# Altium PCB DP-SMD_CAR06-201EN5F.pcbdoc
Units mil, origin at the board's own origin, x right, y up, seen from the top; angles counter-clockwise.
Board outline 1231.66 x 1132.8 mil, 2 copper layers (Top Layer, Bottom Layer), stack 0 mil thick; 1 components, 0 nets, 24 pads, 0 vias.
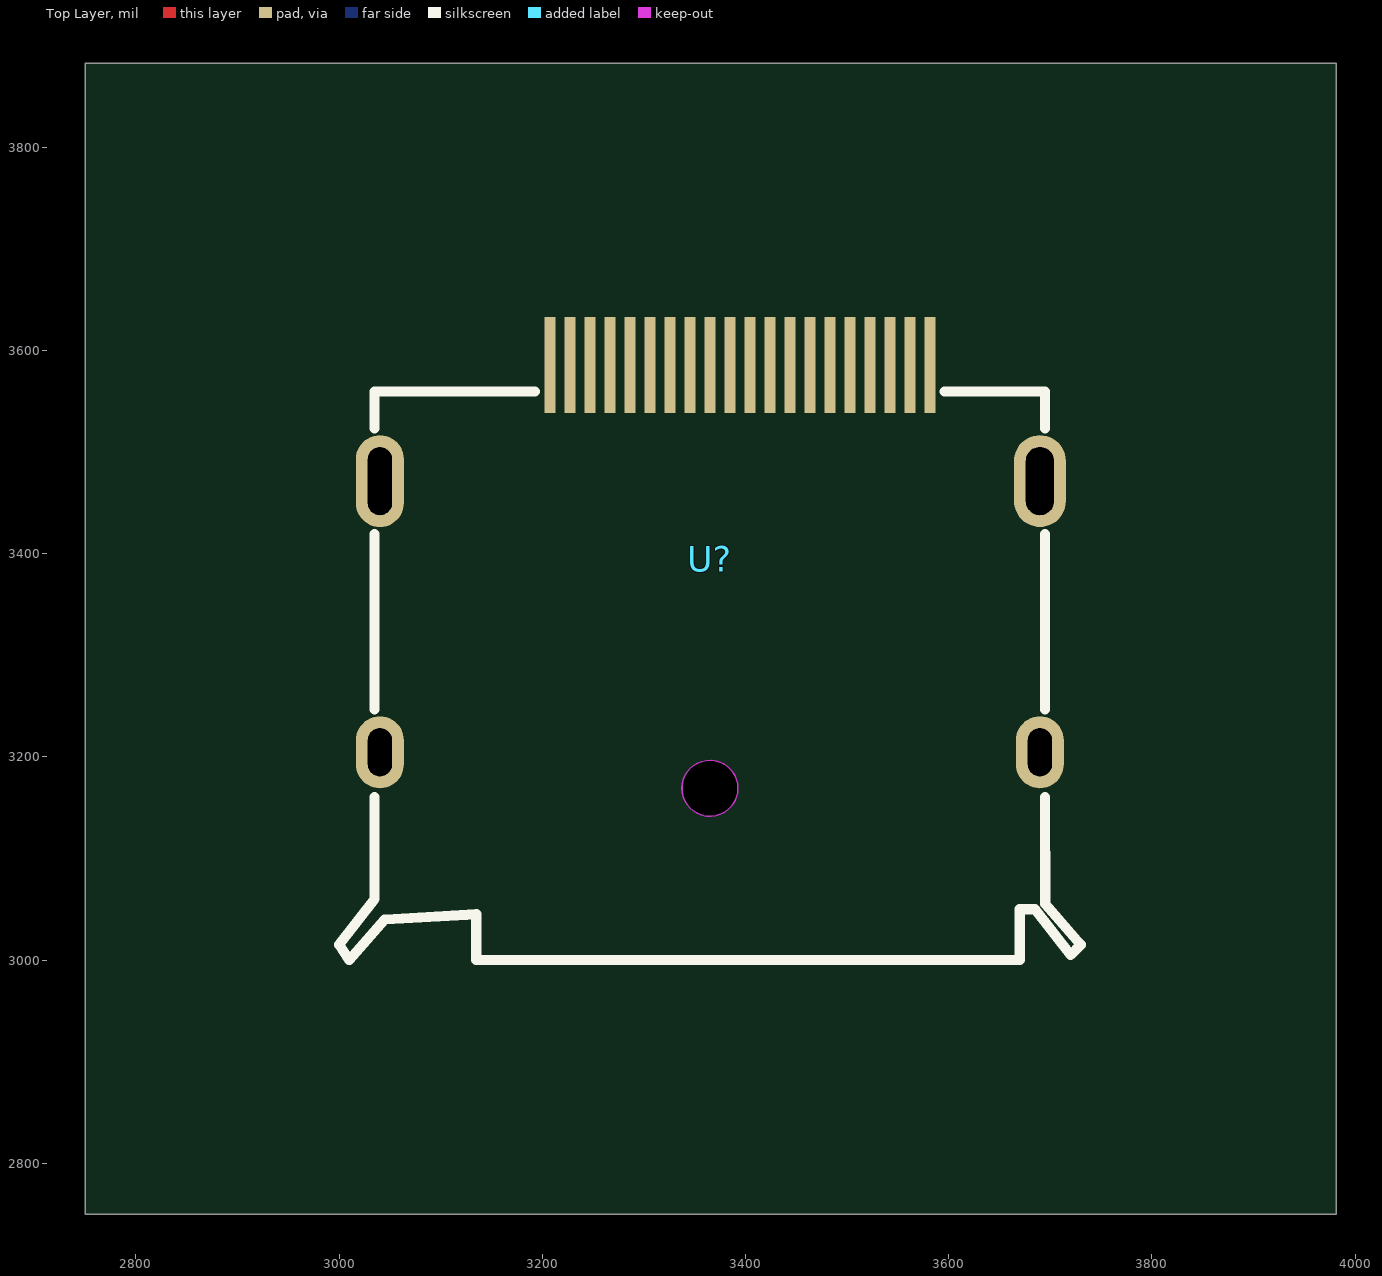
[diagram p0: Top Layer view]
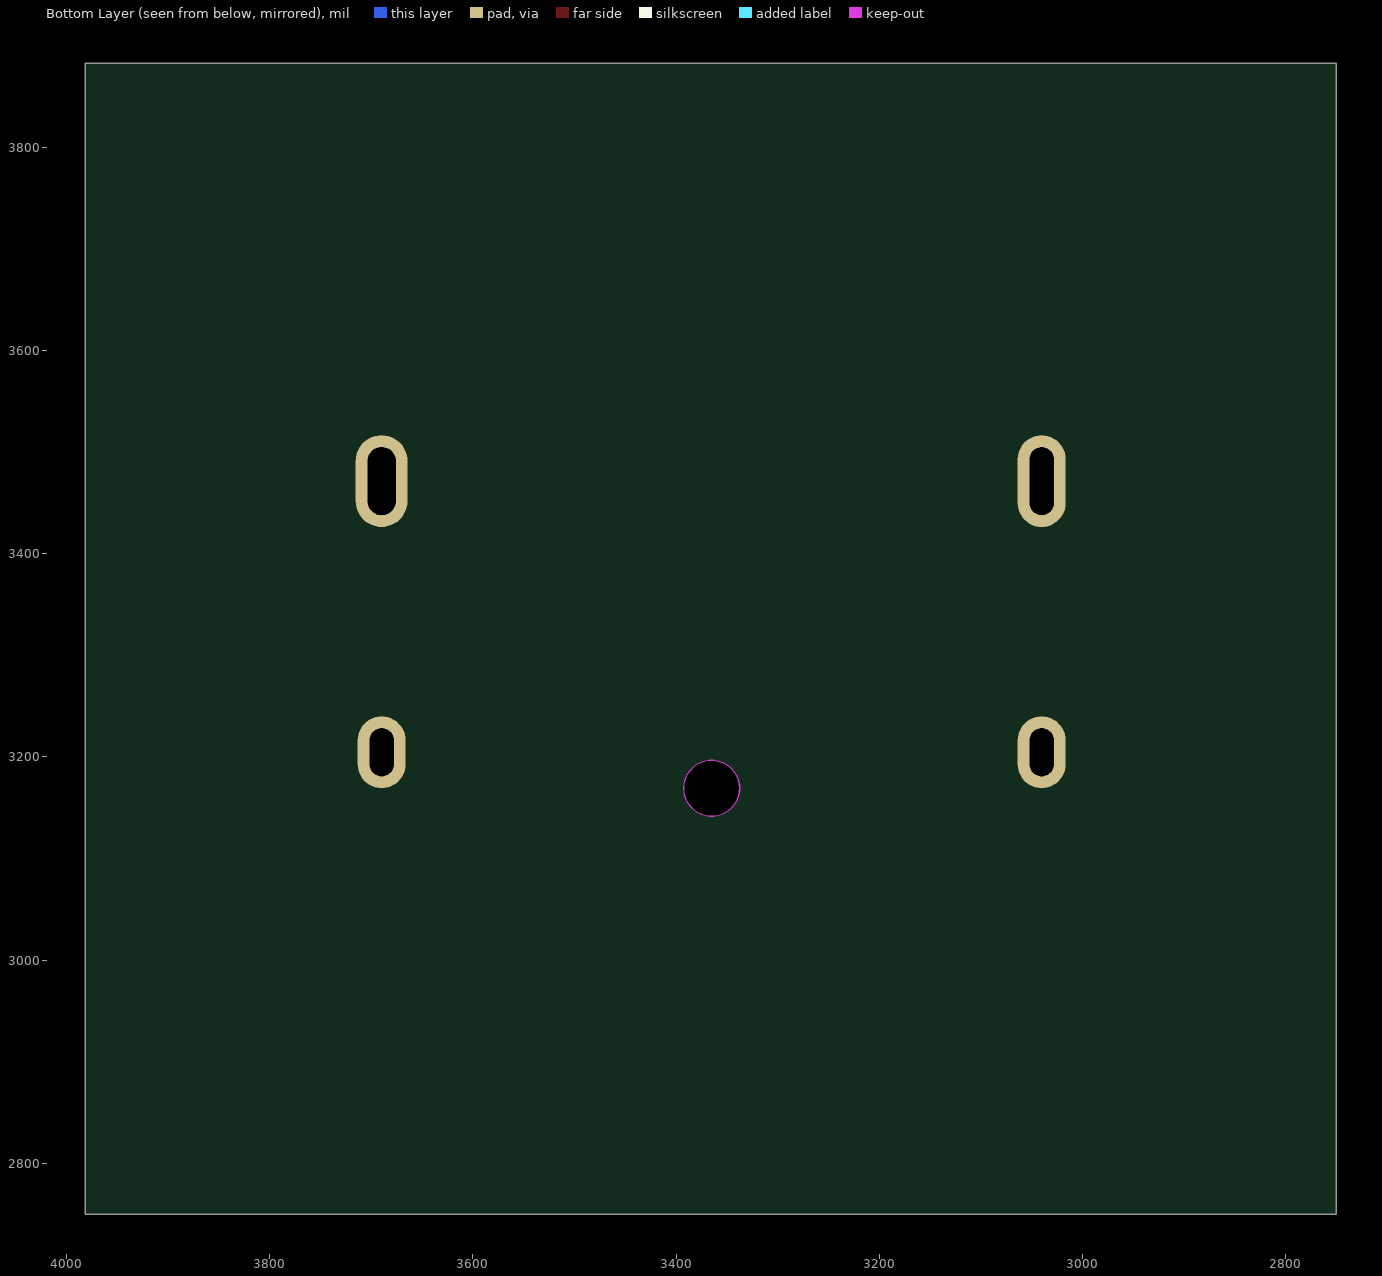
[diagram p1: Bottom Layer view, seen from below]

## Layer stack, top to bottom
Top Layer: signal copper (thickness not stored)
Bottom Layer: signal copper (thickness not stored)

## Board outline
3981.66,2750 2750,2750 2750,3882.8 3981.66,3882.8

## Components (designator, comment, footprint, x,y, rotation, side; value= is the part's Value field where it differs from the comment)
U? "" DP-SMD_CAR06-201EN5F 3365,3395 r0 top

## Footprints (in the part's own frame and the unit in brackets; to place one, negate y for a bottom-side part, rotate by r counter-clockwise, add the part's x,y. Pads: shape width x height; smd on the part's side, far side on the other; paste and mask are expansions set on the pad)
DP-SMD_CAR06-201EN5F [mm]
  rect 0.28x2.4 smd paste-100 mask+0.051: 1(5.5,4.84) 2(5,4.84) 3(4.5,4.84) 4(4,4.84) 5(3.5,4.84) 6(3,4.84) 7(2.5,4.84) 8(2,4.84) 9(1.5,4.84) 10(1,4.84) 11(0.5,4.84) 12(0,4.84) 13(-0.5,4.84) 14(-1,4.84) 15(-1.5,4.84) 16(-2,4.84) 17(-2.5,4.84) 18(-3,4.84) 19(-3.5,4.84) 20(-4,4.84)
  oval 1.2x2.3 hole 0.6 slot 1.7 at 90 deg: 21(-8.25,1.94)
  oval 1.2x1.8 hole 0.6 slot 1.2 at 90 deg: 22(-8.25,-4.84) 23(8.25,-4.84)
  oval 1.3x2.3 hole 0.7 slot 1.7 at 90 deg: 24(8.25,1.94)
  Board Outline Layer circle w0.003: c0,-5.74 r0.7
  Board Outline Layer region: 0.7,-5.74 0.631,-6.044 0.436,-6.287 0.156,-6.422 -0.156,-6.422 -0.436,-6.287 -0.631,-6.044 -0.7,-5.74 -0.7,-5.74 -0.631,-5.436 -0.436,-5.193 -0.156,-5.058 0.156,-5.058 0.436,-5.193 0.631,-5.436 0.7,-5.74
  Board Outline Layer region: 0.7,-5.74 0.69,-5.855 0.662,-5.967 0.616,-6.073 0.552,-6.17 0.474,-6.255 0.383,-6.326 0.281,-6.381 0.172,-6.419 0.058,-6.438 -0.058,-6.438 -0.172,-6.419 -0.281,-6.381 -0.383,-6.326 -0.474,-6.255 -0.552,-6.17 -0.616,-6.073 -0.662,-5.967 -0.69,-5.855 -0.7,-5.74 -0.69,-5.625 -0.662,-5.513 -0.616,-5.407 -0.552,-5.31 -0.474,-5.225 -0.383,-5.154 -0.281,-5.099 -0.172,-5.061 -0.058,-5.042 0.058,-5.042 0.172,-5.061 0.281,-5.099 0.383,-5.154 0.474,-5.225 0.552,-5.31 0.616,-5.407 0.662,-5.513 0.69,-5.625
  Multi-Layer board cut-out: 0.7,-5.74 0.631,-6.044 0.436,-6.287 0.156,-6.422 -0.156,-6.422 -0.436,-6.287 -0.631,-6.044 -0.7,-5.74 -0.7,-5.74 -0.631,-5.436 -0.436,-5.193 -0.156,-5.058 0.156,-5.058 0.436,-5.193 0.631,-5.436 0.7,-5.74
  silkscreen extent -9.27,-10.03 9.27,4.18

## Nets (pads, with @x,y where several pads share a name; then routed paths per layer and width w, separated by ;. In a path a pad name is that pad's centre, name@x,y a point inside that pad or via, vN(x,y) a via of type N, cw(c..) or ccw(c..) an arc to the next point about the centre after c; other vN are vias at no path point)
pads on no net: U?.1 U?.2 U?.3 U?.4 U?.5 U?.6 U?.7 U?.8 U?.9 U?.10 U?.11 U?.12 U?.13 U?.14 U?.15 U?.16 U?.17 U?.18 U?.19 U?.20 U?.21 U?.22 U?.23 U?.24